# Altium PCB featherFet.PcbDoc
Units mm, origin at the board's own origin, x right, y up, seen from the top; angles counter-clockwise.
Board outline 50.04 x 22.86 mm, 2 copper layers (Top Layer, Bottom Layer); 18 components, 23 nets, 77 pads, 3 vias.
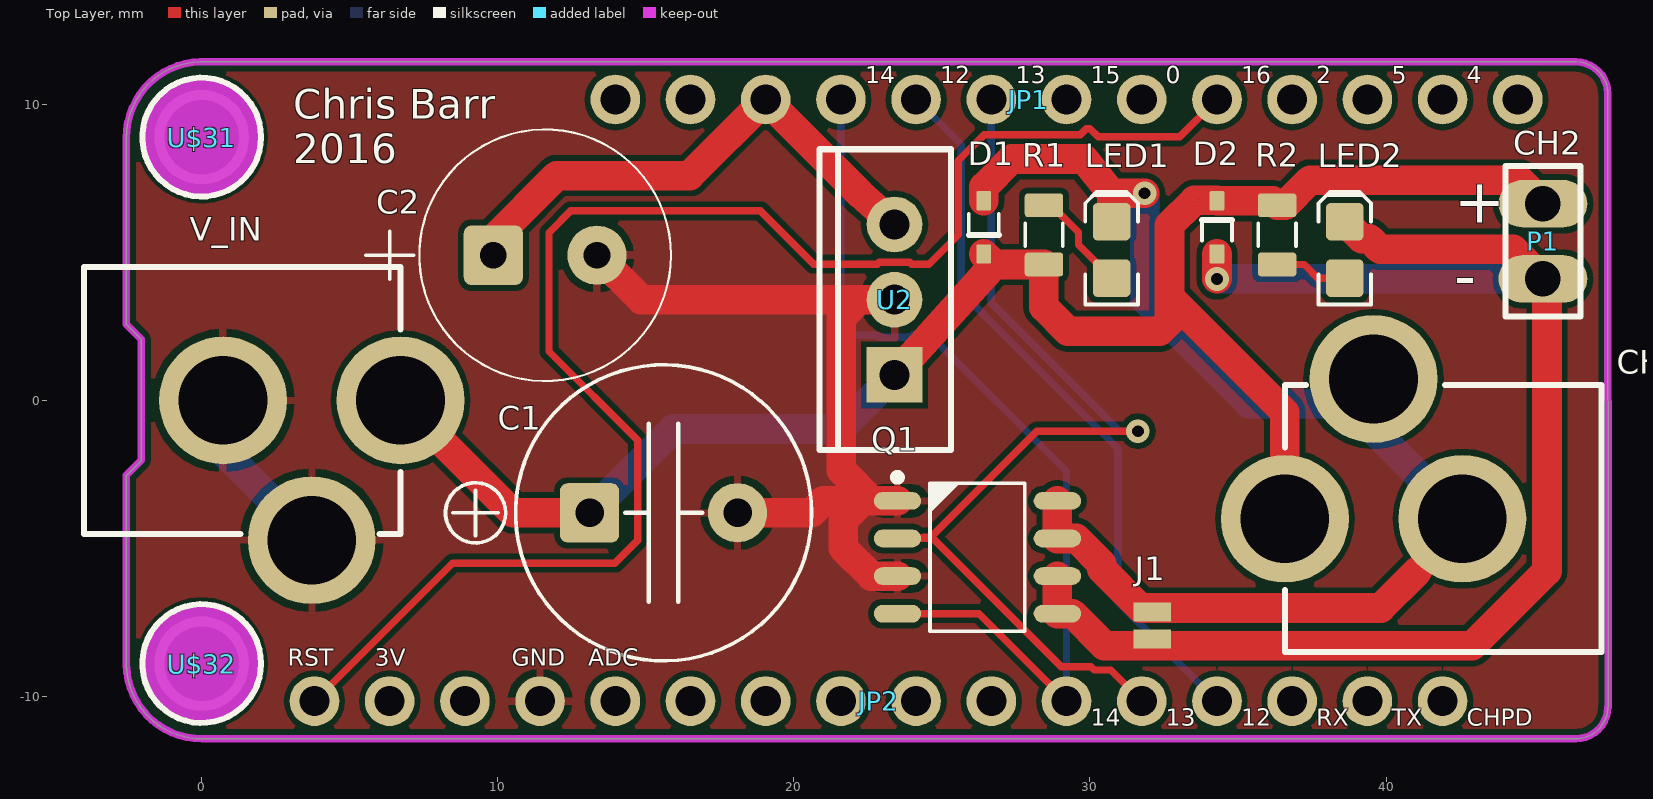
[diagram p0: Top Layer view]
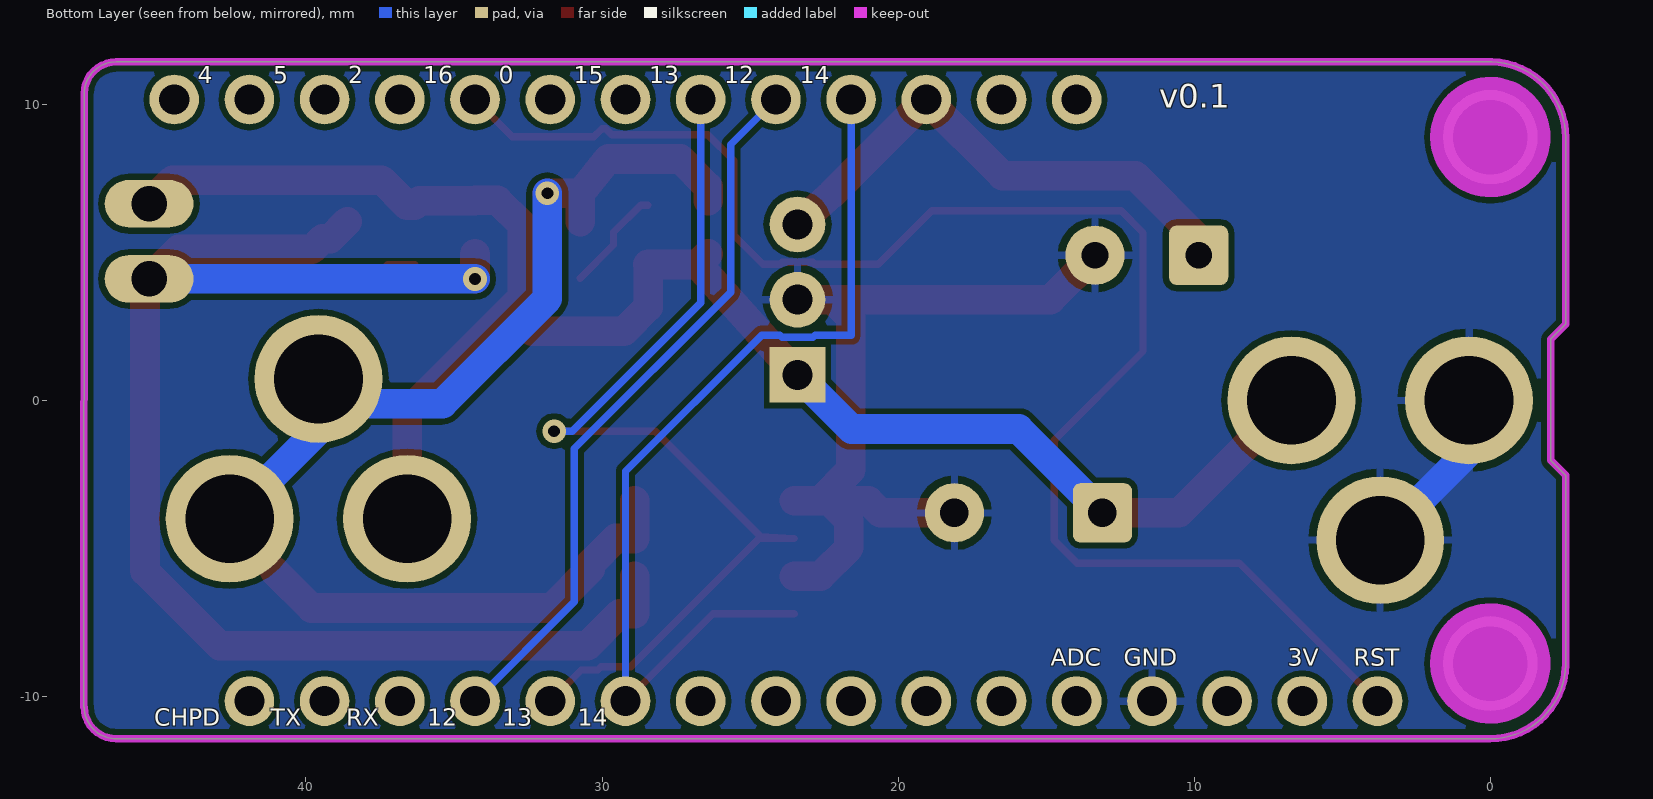
[diagram p1: Bottom Layer view, seen from below]

## Layer stack, top to bottom
Top Solder: solder mask 0.0102, Solder Resist, Dk 3.5
Top Layer: signal copper 0.0356
Dielectric1: dielectric 0.32, FR-4, Dk 4.8
Bottom Layer: signal copper 0.0356
Bottom Solder: solder mask 0.0102, Solder Resist, Dk 3.5

## Board outline
-2.54,-8.929 -2.54,-2.53 -2.04,-2.03 -2.04,2.07 -2.54,2.57 -2.54,8.87 cw(c0,8.89) -0.039,11.43 46.4,11.43 cw(c46.409,10.344) 47.494,10.361 47.5,-10.361 47.494,-10.361 cw(c46.409,-10.344) 46.4,-11.43 0.02,-11.43 cw(c0,-8.89)

## Design rules (kind name [scope] priority, off if disabled: settings)
Clearance [All] p1: gap=0.2
FabricationTestPointUsage TestPointUsage [All] p1: valid=0 allowmultiple=FALSE
FabricationTestpoint Testpoint [All] p1: side=3 testpointundercomponent=TRUE minsize=1.016 maxsize=2.54 preferedsize=1.524 minholesize=0 maxholesize=1.016 preferedholesize=0.813 testpointgrid=0.025 allowsidetop=TRUE allowsidebottom=TRUE usegrid=TRUE gridtolerance=0
HoleSize [All] p1: absolutevalues=TRUE maxlimit=3.5 minlimit=0.025 maxpercent=80.000 minpercent=20.000
PolygonConnect [All] p1: connectstyle=Relief reliefconductorwidth=0.254 reliefentries=4 polygonreliefangle="90 Angle" airgapwidth=0.254
RoutingVias [All] p1: holewidth=0.4 width=0.8 viastyle="Through Hole" minholewidth=0.25 minwidth=0.5 maxholewidth=1 maxwidth=1.4
SilkToSolderMaskClearance SilkscreenOverComponentPads [IsPad] p1: minsilkscreentomaskgap=0.254 clearancetoexposedcopper=TRUE
SolderMaskExpansion [All] p1: expansion=0.102
Width Width_Power [(InNet('+3V3') OR InNet('C1_NEG') OR InNet('C2_NEG') OR InNet('GND') OR InNet('VBUS') OR InNet('V_PWR'))] p1: maxlimit=1 minlimit=0.2 preferedwidth=1 minimp=50.000000 maximp=50.000000 favimp=50.000000
Width [All] p2: maxlimit=1 minlimit=0.2 preferedwidth=0.25
26 further rules are at their usual default settings.

## Components (designator, comment, footprint, x,y, rotation, side; value= is the part's Value field where it differs from the comment)
C1 "470µ" CAPE10.0MM_Rad_10x14mm 15.6,-3.8 r0 top
C2 "220µ" CAPE3.5mm 11.6,4.9 r0 top
CH1 "Power JackThis is the standard 5.5mm barrel jack for power. The PTH is the most common, proven, reliable, footprint. The Slot footprint only works if the mill layer is transmitted to the PCB fab house so be warned. Mating wall wart : TOL-00298 (and others)" POWER_JACK_PTH 50.3,-4 r90 top
D1 "1N4148" SOD523F 26.416,5.842 r90 top
D2 "1N4148" SOD523F 34.29,5.842 r270 top
J1 "JUMPER-PAD-2-NO" PAD-JUMPER-2-NO_NO_SILK 32.1,-7.6 r270 top
JP1 "HEADER-1X12" 1X12_ROUND 27.94,10.16 r0 top locked
JP2 "HEADER-1X16ROUND" 1X16_ROUND 22.86,-10.16 r180 top locked
LED1 "Red" LED-0805-K 30.734,5.08 r90 top
LED2 "Red" LED-0805-K 38.608,5.08 r90 top
P1 "Header 2" HDR1X2 45.3,4.1 r90 top
Q1 "MOSFET_AO4818B" SOIC127P600X175-8AN 26.2,-5.3 r0 top
R1 "Thick Film" RESC2012X70N 28.448,5.588 r90 top
R2 "Thick Film" RESC2012X70N 36.322,5.588 r270 top
U2 "Voltage RegulatorStandard 78xx regulator. IGO (Input Ground Output). Spark Fun Electronics SKU : COM-00107" TO220-IGO 23.4,3.4 r90 top
U$31 "MOUNTINGHOLE2.5" MOUNTINGHOLE_2.5_PLATED 0,8.89 r270 top locked
U$32 "MOUNTINGHOLE2.5" MOUNTINGHOLE_2.5_PLATED 0,-8.89 r270 top locked
V_IN "Power JackThis is the standard 5.5mm barrel jack for power. The PTH is the most common, proven, reliable, footprint. The Slot footprint only works if the mill layer is transmitted to the PCB fab house so be warned. Mating wall wart : TOL-00298 (and others)" POWER_JACK_PTH -7,0 r270 top

## Footprints (in the part's own frame and the unit in brackets; to place one, negate y for a bottom-side part, rotate by r counter-clockwise, add the part's x,y. Pads: shape width x height; smd on the part's side, far side on the other; paste and mask are expansions set on the pad)
1X12_ROUND [mil] "1X12_ROUND"
  round 66 hole 40: 1(-550,0) 2(-450,0) 3(-350,0) 4(-250,0) 5(-150,0) 6(-50,0) 7(50,0) 8(150,0) 9(250,0) 10(350,0) 11(450,0) 12(550,0)
1X16_ROUND [mil] "1X16_ROUND"
  round 66 hole 40: 1(-750,0) 2(-650,0) 3(-550,0) 4(-450,0) 5(-350,0) 6(-250,0) 7(-150,0) 8(-50,0) 9(50,0) 10(150,0) 11(250,0) 12(350,0) 13(450,0) 14(550,0) 15(650,0) 16(750,0)
CAPE3.5mm [mm]
  round 0.508 on Mech15: 0(0,0)
  rrect25% 2x2 hole 0.9: 1(-1.75,0)
  round 2 hole 0.9: 2(1.75,0)
  silkscreen extent -6.05,-4.25 4.25,4.25, body extent -4.25,-4.25 4.22,4.23, height 7.1
CAPE10.0MM_Rad_10x14mm [mm] "10mm Pitch Radial Capacitor 10x14mm DxH"
  round 0.5 on Mech15: 0(0,0)
  rrect25% 2x2 hole 0.965: 1(-2.5,0)
  round 2 hole 0.965: 2(2.5,0)
  silkscreen extent -7.36,-5 5,5, body extent -5.25,-5.24 5.21,5.24, height 13.99
HDR1X2 [mm] "Connector; Header; 2 Position"
  oval 1.6x3 hole 1.2: 1(0,0) 2(2.54,0)
  silkscreen extent -1.27,-1.27 3.81,1.27
LED-0805-K [mil]
  round 20 on Mech15: 0(0,0)
  rrect25% 50x50 smd: A(-37.5,0) K(37.5,0)
  Top Layer pour cut-out: -15,30 15,30 15,-30 -15,-30
  silkscreen extent -72,-35 77,35, body extent -39,-25 39,25, height 31
MOUNTINGHOLE_2.5_PLATED [mil] "MOUNTINGHOLE_2.5_PLATED"
  round 126 hole 99: P$1(0,0)
  Top Layer keep-out circle w80: c0,0 r40
  Bottom Layer keep-out circle w80: c0,0 r40
  silkscreen extent -79,-79 79,79
PAD-JUMPER-2-NO_NO_SILK [mm]
  rect 0.635x1.27 smd: 1(-0.45,0) 2(0.457,0)
POWER_JACK_PTH [mil]
  round 170 hole 118: GND(0,304) GNDBREAK(186,422) PWR(0,540)
  silkscreen extent -177,119 178,540
RESC2012X70N [mm] "Chip Resistor, Body 2.0x1.2mm, EIA 0805, IPC Medium Density"
  round 0.254 on Mech15: 0(0,0)
  rrect25% 0.8x1.3 smd: 1(-1,0) 2(1,0)
  Top Layer pour cut-out: -0.725,0.65 -0.525,0.85 0.525,0.85 0.725,0.65 0.725,-0.65 0.525,-0.85 -0.525,-0.85 -0.725,-0.65
  silkscreen extent -0.38,-0.64 0.38,0.64, body extent -1.1,-0.67 1.1,0.68, height 0.69
SOD523F [mm] "SOD-523F; 2 Leads; Body 1.3 x 0.9 mm, (LxW)"
  round 0.508 on Mech15: 0(0,0)
  rrect20% 0.65x0.5 smd: A(0.9,0) K(-0.9,0)
  Top Layer pour cut-out: -0.725,-0.25 -0.725,0.25 -0.525,0.45 0.525,0.45 0.725,0.25 0.725,-0.25 0.525,-0.45 -0.525,-0.45
  silkscreen extent -0.25,-0.51 0.45,0.51, body extent -0.85,-0.45 0.85,0.45, height 0.7
SOIC127P600X175-8AN [mm] "SOIC, 8-Leads, Body 4.9x3.9mm, Pitch 1.27mm, IPC Medium Density"
  round 1 on Mech15: 0(0,0)
  oval 1.6x0.6 smd: 1(-2.7,1.905) 2(-2.7,0.635) 3(-2.7,-0.635) 4(-2.7,-1.905) 5(2.7,-1.905) 6(2.7,-0.635) 7(2.7,0.635) 8(2.7,1.905)
  silkscreen extent -2.82,-2.5 1.6,2.82, body extent -3,-2.45 3,2.45, height 1.75
TO220-IGO [mil]
  round 74 hole 40: GND(0,0) OUT(100,0)
  rect 74x74 hole 40: IN(-100,0)
  silkscreen extent -200,-75 200,100

## Part data
C1: library part CAPE_470u_16V_THT, "Capacitor THT Alum Elec 470uF 20% 16V"
C2: library part CAPE_220u_16V_THD, "Capacitor THT Alum Elec 220uF 20% 16V"
CH1 V_IN: library part POWER_JACKPTH
D1 D2: library part DIODE_1N4148_200mA_SOD523F, "Diode SMD small signal 0.2A SOD-523F"
JP2: "PIN HEADER"
LED1 LED2: library part LED_SMD_Red_0805_6mcd, "LED 0805 SMD Red 6mcd 621nm"
P1: "Header, 2-Pin"
Q1: "MOSFET Dual-Channel 30V 8.5A SOIC-8 SMD"
R1 R2: library part RES_2K2_0805_1%, "Resistor SMD chip 2.2k Ohm 0.125W 1% 0805"
U2: library part V_REG_78XXSINK
U$31 U$32: "Mounting Hole   For #2 screws (0.086\"/2.18mm width, 0.094\"/2.4mm hole) use 2.5mm"

## Free pads (board coordinates)
  round 1.676 hole 1.016: 0(44.45,10.16)

## Via types
v1: diameter 0.8, hole 0.4, Top Layer to Bottom Layer, tented both sides, 3 vias

## Nets (pads, with @x,y where several pads share a name; then routed paths per layer and width w, separated by ;. In a path a pad name is that pad's centre, name@x,y a point inside that pad or via, vN(x,y) a via of type N, cw(c..) or ccw(c..) an arc to the next point about the centre after c; other vN are vias at no path point)
+3V3: JP2.15
ADC: JP2.12
C1_NEG: CH1.GND CH1.GNDBREAK D1.A J1.1 LED1.K Q1.7 Q1.8 | length 39.8
  Top Layer w1: D1.A 26.416,7.21 27.356,8.15 29.794,8.15 30.734,6.994 ; Q1.8 Q1.7 29.544,-4.665 30.4,-5.521 30.4,-5.7 31.714,-7.014 39.817,-7.014 41.055,-5.776 ; LED1.K 30.734,6.994 ; v1(31.848,6.994) 30.734,6.994
  Bottom Layer w1: v1(31.848,6.994) 31.848,3.43 35.39,-0.112 CH1.GNDBREAK@37.789,-0.112 ; CH1.GNDBREAK 39.581,-1.003 CH1.GND
C1_PWM: JP1.6 JP2.5 Q1.2 | length 33.8
  Top Layer w0.25: v1(31.62,-1.042) 28.207,-1.042 24.642,-4.607 ; JP2.5 30.699,-9.109 30.142,-9.109 30.03,-8.997 29.031,-8.997 24.642,-4.607 ; 24.642,-4.607 24.584,-4.665 Q1.2 24.642,-4.607
  Bottom Layer w0.25: JP1.6 26.67,3.296 31.008,-1.042 v1(31.62,-1.042)
C2_NEG: D2.A J1.2 LED2.K P1.1 Q1.5 Q1.6 | length 48.6
  Top Layer w1: Q1.6 Q1.5 29.405,-7.205 30.484,-8.284 42.916,-8.284 45.437,-5.763 45.437,3.963 P1.1 44.3,5.1 39.802,5.1 39.44,5.463 39.178,5.463 LED2.K ; v1(34.29,4.1) D2.A
  Bottom Layer w1: v1(34.29,4.1) P1.1
C2_PWM: JP1.4 JP2.6 Q1.4 | length 32.2
  Top Layer w0.25: Q1.4 26.255,-7.205 JP2.6
  Bottom Layer w0.25: JP1.4 21.59,2.203 22.808,2.203 22.876,2.135 23.924,2.135 23.992,2.203 24.613,2.203 29.21,-2.394 JP2.6
CH_PD: JP2.1
EN: JP1.2
GND: C1.2 C2.2 JP2.13 Q1.1 Q1.3 U2.GND V_IN.GND V_IN.GNDBREAK | length 33.8
  Top Layer w1: C2.2 14.85,3.4 22.209,3.4 ; C1.2 20.596,-3.8 21.001,-3.395 22.323,-3.395 ; U2.GND 22.209,3.4 ; Q1.3 22.616,-5.935 21.663,-4.982 21.663,-4.055 22.323,-3.395 ; Q1.1 22.642,-3.395 ; 22.209,3.4 21.6,2.791 21.6,-2.353 22.642,-3.395 ; 22.323,-3.395 22.642,-3.395
  Bottom Layer w1: V_IN.GND 0.722,-1.727 V_IN.GNDBREAK
GPIO0: JP1.8
GPIO2: JP1.10
GPIO4/SDA: JP1.12
GPIO5/SCL: JP1.11
GPIO12/MISO: JP1.5 JP2.4 | length 24.5
  Bottom Layer w0.25: JP1.5 25.651,8.639 25.651,3.654 30.934,-1.629 30.934,-6.804 JP2.4
GPIO15: JP1.7
GPIO16: JP1.9 JP2.16 | length 52.5
  Top Layer w0.25: JP2.16 8.47,-5.5 13.956,-5.5 14.73,-4.726 14.73,-1.351 11.73,1.649 11.73,5.66 12.471,6.4 18.867,6.4 20.667,4.6 22.811,4.6 22.876,4.665 23.924,4.665 23.989,4.6 24.564,4.6 25.549,5.585 25.549,8.099 26.425,8.975 29.67,8.975 29.874,9.179 30.001,9.179 30.28,8.9 33.03,8.9 JP1.9
NetLED1_A: LED1.A R1.2 | length 3.6
  Top Layer w0.25: R1.2 28.699,6.588 29.613,5.674 29.613,5.248 LED1.A
NetLED2_A: LED2.A R2.2 | length 2.5
  Top Layer w0.25: R2.2 37.233,4.588 37.694,4.127 LED2.A
RXD: JP2.3
TXD: JP2.2
V_PWR: C1.1 CH1.PWR D1.K D2.K P1.2 R1.1 R2.1 U2.IN V_IN.PWR | length 59.7
  Top Layer w1: V_IN.PWR 10.516,-3.8 C1.1 ; U2.IN 26.77,4.588 ; D1.K 26.77,4.588 ; R1.1 R1.1@28.445,4.588 ; CH1.PWR@36.584,-4.1 36.584,-0.405 32.687,3.491 ; P1.2 44.501,7.439 37.439,7.439 36.588,6.588 R2.1 36.168,6.742 D2.K 34.29,6.753 33.525,6.753 32.687,5.915 32.687,3.491 ; 26.77,4.588 R1.1@28.445,4.588 ; R1.1@28.445,4.588 28.445,3.146 29.258,2.334 32.356,2.334 32.687,2.664 32.687,3.491
  Bottom Layer w1: C1.1 15.932,-0.968 21.572,-0.968 U2.IN
VBAT: JP1.1
VBUS: C2.1 JP1.3 U2.OUT | length 17.8
  Top Layer w1: C2.1 9.85,5.45 11.991,7.591 16.481,7.591 JP1.3 22.244,6.966 U2.OUT
pads on no net: C1.0 C2.0 D1.0 D2.0 JP2.7 JP2.8 JP2.9 JP2.10 JP2.11 JP2.14 LED1.0 LED2.0 Q1.0 R1.0 R2.0 U$31.P$1 U$32.P$1

## Polygon pours and split planes (outlines as drawn)
GND on Bottom Layer "Bottom Layer-GND" (solid, pour order 4): -2.6,11.5 -2.6,-11.4 47.5,-11.4 47.5,11.5
GND on Top Layer "Bottom Layer-GND" (solid, pour order 6): -2.6,11.5 -2.6,-11.4 47.5,-11.4 47.5,11.5

## Keep-outs
Keep-Out Layer:
  lines w0.254: -0.039,11.43 ccw(c0,8.89) -2.54,8.87 -2.54,2.57 -2.04,2.07 -2.04,-2.03 -2.54,-2.53 -2.54,-8.929 ccw(c0,-8.89) 0.02,-11.43 46.4,-11.43 ccw(c46.409,-10.344) 47.494,-10.361 ; -0.039,11.43 46.4,11.43 cw(c46.409,10.344) 47.494,10.361 47.5,-10.361

## Silkscreen, mask and mechanical layers (free items; w line width, h text height)
Top Overlay:
  text "14" at 22.407,10.515 h1
  text "12" at 24.947,10.515 h1
  text "13" at 27.487,10.515 h1
  text "15" at 30.027,10.515 h1
  text "0" at 32.567,10.515 h1
  text "16" at 35.107,10.515 h1
  text "2" at 37.647,10.515 h1
  text "5" at 40.187,10.515 h1
  text "4" at 42.727,10.515 h1
  text "CH2" at 44.3,8.3 h0.8
  text "Chris Barr / 2016" at 3.1,8.01 h1
  text "+" at 42.3,6 h1.5
  text "-" at 42.3,3.46 h1.5
  text "RST" at 2.91,-9.16 h1
  text "3V" at 5.84,-9.16 h1
  text "GND" at 10.48,-9.16 h1
  text "ADC" at 13.05,-9.16 h1
  text "14" at 30.027,-11.195 h1
  text "13" at 32.567,-11.195 h1
  text "12" at 35.107,-11.195 h1
  text "RX" at 37.647,-11.195 h1
  text "TX" at 40.187,-11.195 h1
  text "CHPD" at 42.727,-11.195 h1
Bottom Overlay:
  text "14" at 23.331,10.515 h1
  text "12" at 25.871,10.515 h1
  text "13" at 28.411,10.515 h1
  text "15" at 30.951,10.515 h1
  text "0" at 33.491,10.515 h1
  text "16" at 36.031,10.515 h1
  text "2" at 38.571,10.515 h1
  text "5" at 41.111,10.515 h1
  text "4" at 43.651,10.515 h1
  text "v0.1" at 11.175,9.875 h0.8
  text "RST" at 4.61,-9.16 h1
  text "3V" at 6.84,-9.16 h1
  text "GND" at 12.38,-9.16 h1
  text "ADC" at 14.85,-9.16 h1
  text "14" at 30.827,-11.195 h1
  text "13" at 33.367,-11.195 h1
  text "12" at 35.907,-11.195 h1
  text "RX" at 38.647,-11.195 h1
  text "TX" at 41.187,-11.195 h1
  text "CHPD" at 45.127,-11.195 h1
Mechanical 4:
  lines w0.254: 7.25,-8.93 7.25,9.07 43.5,9.07 43.5,-8.93 7.25,-8.93
Mechanical 14:
  lines w0.254: -2.032,0 46.95,0
Mechanical 16:
  drawing of 1878 lines, arcs and shapes, not listed
  text "1" at -97.285,73.479 h1.78
  text "2" at -24.641,73.479 h1.78
  text "3" at 48.511,73.479 h1.78
  text "4" at 121.409,73.479 h1.78
  text "A" at -131.626,50.467 h1.78
  text "A" at 155.394,50.467 h1.78
  text "B" at -131.626,2.41 h1.78
  text "B" at 155.394,2.41 h1.78
  text "C" at -131.626,-46.104 h1.78
  text "C" at 155.394,-46.104 h1.78
  text "ENGINEER:" at 40.459,-83.112 h1.14
  text "TITLE:" at 78.559,-83.112 h1.14
  text "PCB DESIGNER:" at 40.459,-90.605 h1.14
  text "D" at -131.626,-94.11 h1.78
  text "D" at 155.394,-94.11 h1.78
  text "DATE:" at 40.459,-98.352 h1.14
  text "PART NO.:" at 78.559,-98.352 h1.14
  text "REV:" at 131.899,-98.352 h1.14
  text "Altium Limited" at 7.439,-100.892 h1.78
  text ".PRINT_DATE" at 41.729,-101.4 h1.78
  text "12a Rodborough Rd" at 7.439,-103.432 h1.78
  text "Frenchs Forest" at 7.439,-105.972 h1.78
  text "FILE NAME:" at 40.459,-105.972 h1.14
  text "DWG NO:" at 78.559,-105.972 h1.14
  text "SCALE:" at 131.899,-105.972 h1.14
  text "NSW 2086" at 7.439,-108.512 h1.78
  text ".PCB_FILE_NAME_NO_PATH" at 41.729,-109.02 h1.78
  text "1" at -97.285,-114.481 h1.78
  text "2" at -24.641,-114.481 h1.78
  text "3" at 48.511,-114.481 h1.78
  text "4" at 121.409,-114.481 h1.78

## Dimensions
7.25,9.07 to 43.5,9.07 on Mechanical 4
7.25,9.07 to 7.25,-8.93 on Mechanical 4
1.905,11.43 to 2.235,-11.43 on Mechanical 12
0,8.89 to 0,-8.89 on Mechanical 12
-2.54,8.87 to 47.494,10.361 on Mechanical 12